# Altium PCB Encoder_Board.PcbDoc
Units mil, origin at the board's own origin, x right, y up, seen from the top; angles counter-clockwise.
Board outline 1200 x 1520 mil, 2 copper layers (Top Layer, Bottom Layer); 5 components, 4 nets, 20 pads, 2 vias.
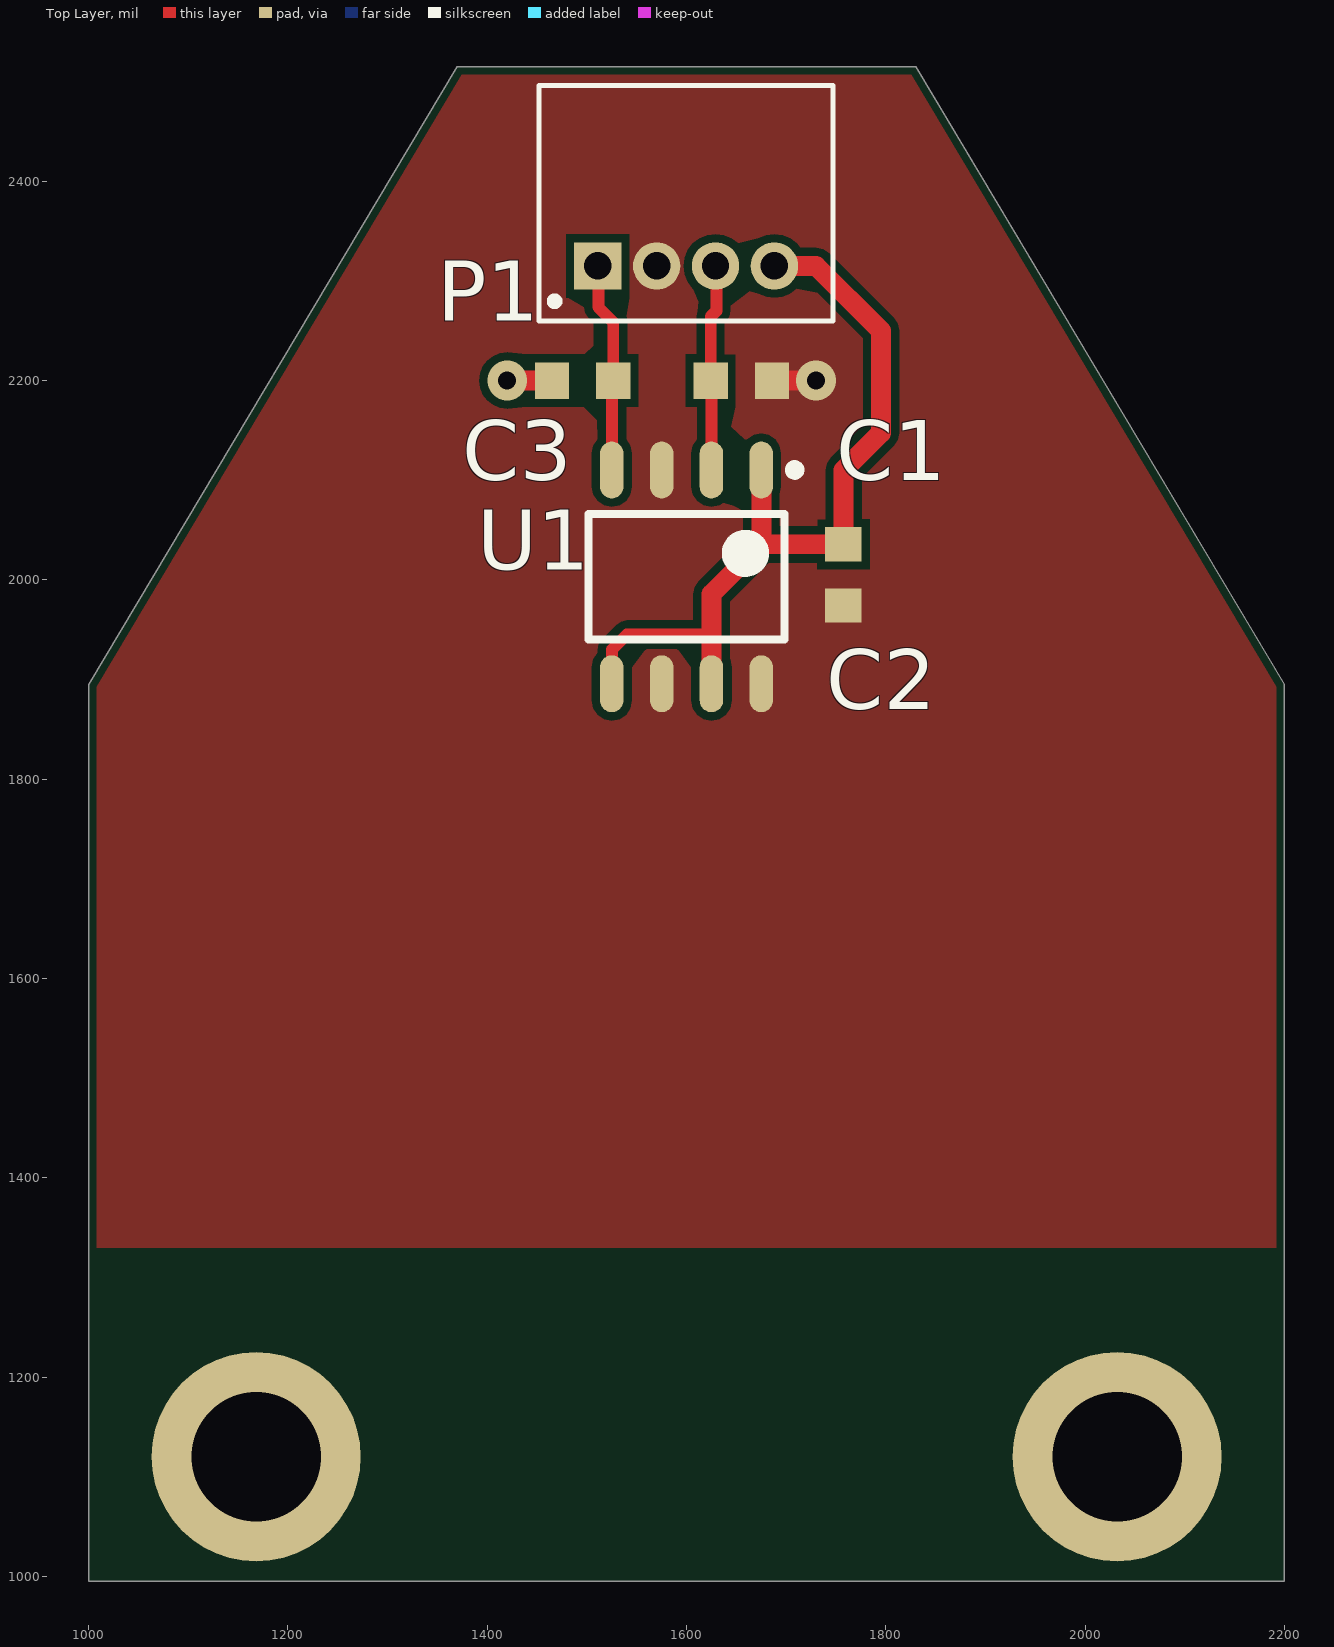
[diagram p0: Top Layer view]
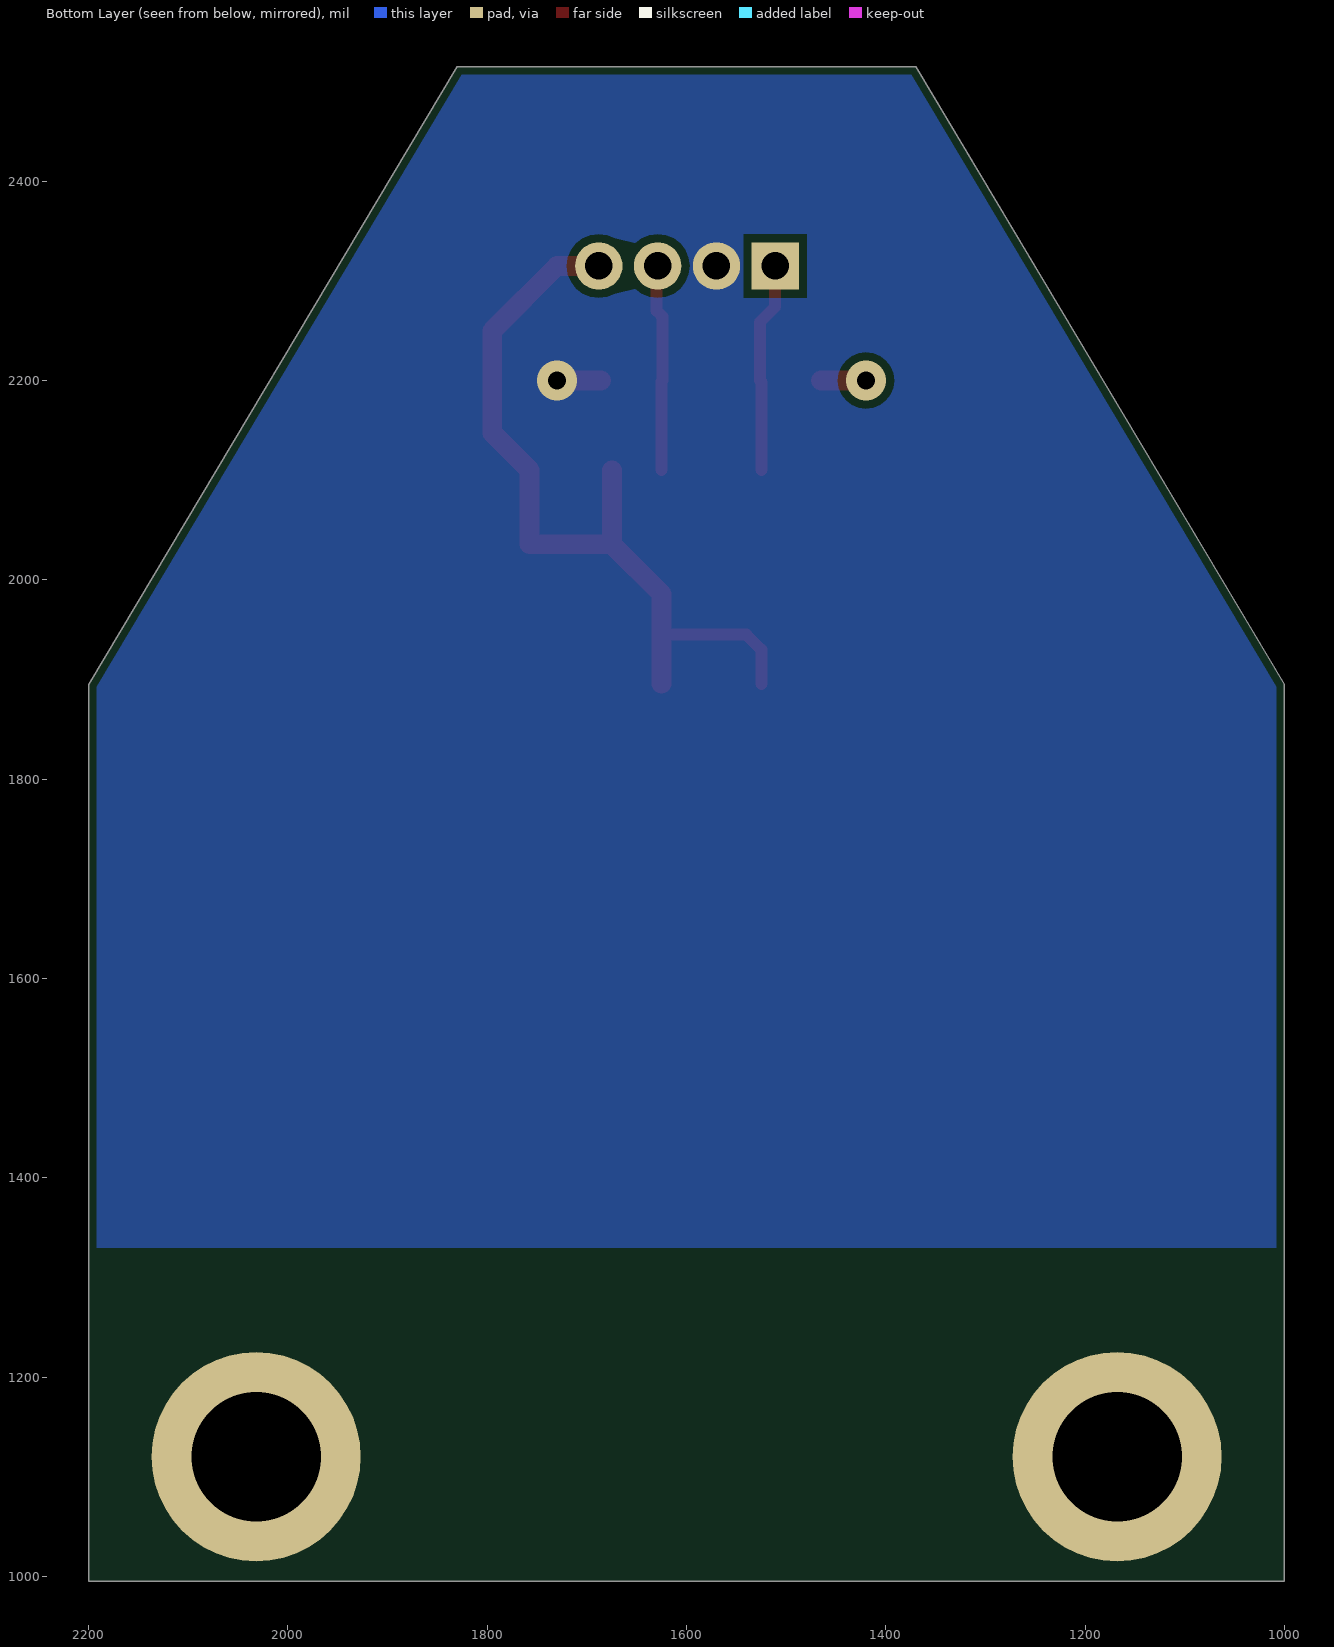
[diagram p1: Bottom Layer view, seen from below]

## Layer stack, top to bottom
Top Solder: solder mask 0.4, Solder Resist, Dk 3.5
Top Layer: signal copper 1.4
Dielectric 1: dielectric 12.6, FR-4, Dk 4.8
Bottom Layer: signal copper 1.4
Bottom Solder: solder mask 0.4, Solder Resist, Dk 3.5

## Board outline
1000,995 1000,1895 1369.92,2515 1830.08,2515 2200,1895 2200,995

## Design rules (kind name [scope] priority, off if disabled: settings)
BoardOutlineClearance [All] p1: gap=7.87 except(15.75: Arc-SplitBarrior Arc-SplitContinuation Track-SplitBarrior Track-SplitContinuation SMDPad-SplitBarrior SMDPad-SplitContinuation THPad-SplitBarrior THPad-SplitContinuation Via-SplitBarrior Via-SplitContinuation Fill-SplitBarrior Fill-SplitContinuation Poly-SplitBarrior Poly-SplitContinuation Region-SplitBarrior Region-SplitContinuation Text-SplitBarrior Text-SplitContinuation)
Clearance "Clearance Bottom Layer" [OnLayer('Bottom Layer')] p1: gap=8 except(10: Arc-Text Track-Text SMDPad-Text THPad-Text Via-Text Fill-Text Poly-Text Region-Text Text-Text)
Clearance "Clearance Top Layer" [OnLayer('Top Layer')] p2: gap=8 except(10: Arc-Text Track-Text SMDPad-Text THPad-Text Via-Text Fill-Text Poly-Text Region-Text Text-Text)
Clearance [All] p3: gap=7.87 except(3.5: Arc-Arc Arc-Track Arc-SMDPad Track-Track Track-SMDPad SMDPad-SMDPad; 5: Arc-Via Track-Via SMDPad-Via THPad-Via Via-Via; 10: Arc-Text Track-Text SMDPad-Text THPad-Text Via-Text Fill-Text Poly-Text Region-Text Text-Text)
HoleSize [All] p1: absolutevalues=TRUE maxlimit=248.03 minlimit=7.87 maxpercent=80.000 minpercent=20.000
MinimumAnnularRing [All] p1: minimumring=3
MinimumSolderMaskSliver [All] p1: minsoldermaskwidth=3.94
PolygonConnect PolygonConnect_2 [All vs IsNamedPolygon('GND_L02_P004')] p1: connectstyle=Direct reliefconductorwidth=10 reliefentries=4 polygonreliefangle="90 Angle" airgapwidth=10
PolygonConnect [All vs IsNamedPolygon('GND_L01_P002')] p2: connectstyle=Direct reliefconductorwidth=10 reliefentries=4 polygonreliefangle="90 Angle" airgapwidth=10
PolygonConnect PolygonConnect_1 [All] p3: connectstyle=Relief reliefconductorwidth=10 reliefentries=4 polygonreliefangle="45 Angle" airgapwidth=10
RoomDefinition Mag_Encoder_KMZ60 [InComponentClass('Mag_Encoder_KMZ60')] p1: confinementstyle=ConfineIn formatcopy=TRUE lockcomponents=FALSE outline 1000,985 2205,985 2205,2540 1000,2540
RoutingCorners [All] p1: cornerstyle=Round minsetback=100 maxsetback=100
RoutingVias [All] p1: holewidth=19.68 width=39.37 viastyle="Through Hole" minholewidth=7.87 minwidth=17.72 maxholewidth=39.37 maxwidth=78.74
SilkToSilkClearance [All] p1: silktosilkclearance=3.94
SilkToSolderMaskClearance [IsPad] p1: minsilkscreentomaskgap=3.94 clearancetoexposedcopper=TRUE
SolderMaskExpansion [All] p1: expansion=4
Width [All] p1: maxlimit=100 minlimit=3.5 preferedwidth=15
25 further rules are at their usual default settings.

## Components (designator, comment, footprint, x,y, rotation, side; value= is the part's Value field where it differs from the comment)
C1 "CL10B104KB8NNNL" *CAPC1608X90N 1757.45,2005 r270 top
C2 "CL10B202KB8NNNC" *CAPC1608X90N 1655,2200 r180 top
C3 "CL10B202KB8NNNC" *CAPC1608X90N 1495.71,2200 r0 top
P1 "S4B-ZR_LF/SN" *JST_S4B-ZR(LF)(SN) 1599.53,2315 r0 top
U1 "KMZ60" SOIC127P600X175-8N 1600,2003 r270 top

## Footprints (in the part's own frame and the unit in brackets; to place one, negate y for a bottom-side part, rotate by r counter-clockwise, add the part's x,y. Pads: shape width x height; smd on the part's side, far side on the other; paste and mask are expansions set on the pad)
*CAPC1608X90N [mm]
  rect 0.87x0.93 smd: 1(-0.78,0) 2(0.78,0)
*JST_S4B-ZR(LF)(SN) [mm]
  rect 1.208x1.208 hole 0.7: 1(-2.25,0)
  round 1.208 hole 0.7: 2(-0.75,0) 3(0.75,0) 4(2.25,0)
  silkscreen extent -3.75,-1.4 3.75,4.6, body extent -3.75,-1.43 3.75,4.57, height 3.81
SOIC127P600X175-8N [mm] "SOIC, 8-Leads, Body 4.90x3.90mm, Pitch 1.27mm, IPC Medium Density"
  oval 1.45x0.6 smd: 1(-2.725,1.905) 2(-2.725,0.635) 3(-2.725,-0.635) 4(-2.725,-1.905) 5(2.725,-1.905) 6(2.725,-0.635) 7(2.725,0.635) 8(2.725,1.905)
  silkscreen extent -2.85,-2.5 1.6,2.88, body extent -2,-2.5 2,2.5, height 1.75

## Part data
C1: "Cap Ceramic 0.1uF 50V X7R 10% Pad SMD 0603 125°C T/R"
C2 C3: library part CL10B104KB8NNNL, "Cap Ceramic 2nF 50V X7R 10% Pad SMD 0603 125°C T/R"
P1: library part S4B-ZR_(LF)(SN), "Conn Shrouded Header HDR 4 POS 1.5mm Solder RA Thru-Hole Box"
U1: library part KVM60

## Free pads (board coordinates)
  round 210 hole 130: 0(1168,1120) 1(2032,1120)

## Via types
v1: diameter 40, hole 18, Top Layer to Bottom Layer, 2 vias

## Nets (pads, with @x,y where several pads share a name; then routed paths per layer and width w, separated by ;. In a path a pad name is that pad's centre, name@x,y a point inside that pad or via, vN(x,y) a via of type N, cw(c..) or ccw(c..) an arc to the next point about the centre after c; other vN are vias at no path point)
GND: C1.2 C2.1 P1.2 U1.3 U1.6 U1.8 | length 44.3
  Top Layer w20: C2.1 v1(1730,2200)
VCC: C1.1 P1.4 U1.1 U1.5 U1.7 | length 815.7
  Top Layer w12: U1.5 1525,1930 1540,1945 1625,1945 ; U1.1@1675,2110 U1.1
  Top Layer w20: U1.7 1625,1945 1625,1985.71 1675,2035.71 U1.1@1675,2110 ; 1680.71,2035.71 C1.1 1757.45,2110 1795,2147.55 1795,2250 1730,2315 P1.4@1688.58,2315
VOUT1: C2.2 P1.3 U1.2 | length 207.6
  Top Layer w12: U1.2 1625,2199.29 C2.2 1624.29,2264.29 1630,2270 1630,2314.53 P1.3@1629.53,2315
VOUT2: C3.2 P1.1 U1.4 | length 211.5
  Top Layer w12: P1.1@1511.42,2315 1511.42,2273.58 1526.42,2258.58 C3.2 1525,2198.58 U1.4
pads on no net: C3.1
copper on no net: | length 45
  Top Layer w20: v1(1420,2200) 1465,2200

## Polygon pours and split planes (outlines as drawn)
GND on Top Layer "GND_L01_P002" (solid, pour order 2): 982.12,1330 2215,1330 2215,2145 1835,2525 1370,2525 985.6,2140.6
GND on Bottom Layer "GND_L02_P004" (solid, pour order 4): 2205,1330 995,1330 995,1905 1000,2155 1365,2530 1830,2530 2205,2155

## Silkscreen, mask and mechanical layers (free items; w line width, h text height)
Mechanical 1:
  the board outline again, w12